# EAGLE board eeZeeTiny841 (EAGLE 6.4)
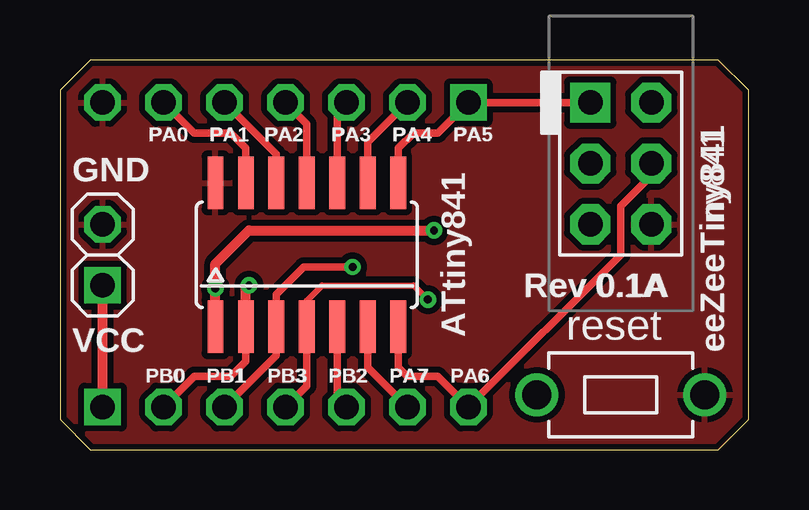
[diagram p0: board, top side]
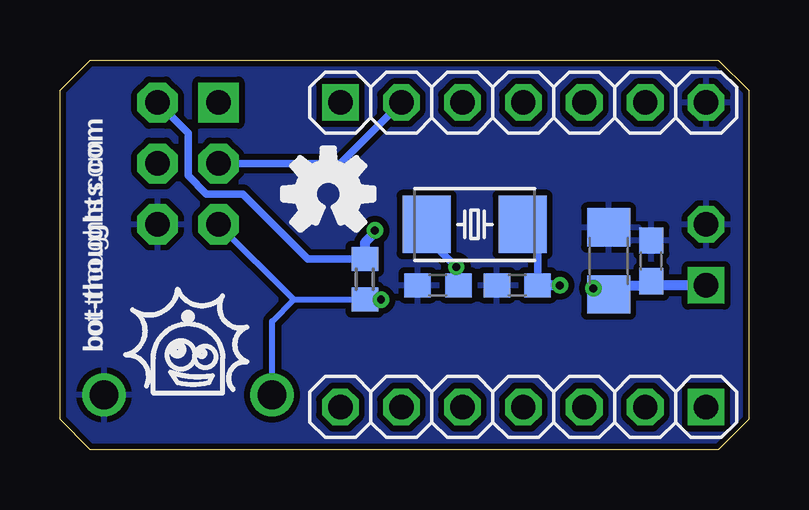
[diagram p1: board, bottom side, seen from below]

Size 28.7 x 16.26 mm. Coordinates in mm from the lower left corner, seen from the top.
Outline: 0,14.99 0,1.27 1.27,0 27.43,0 28.7,1.27 28.7,14.99 27.43,16.26 1.27,16.26 0,14.99
Copper layers (1*16): Top 0.0356mm / dielectric 1.5011mm / Bottom 0.0356mm
Design rules "LaenPCBOrder *": minimum track width 6mil, minimum drill 13mil, track to track 10mil, track to pad 10mil, pad to pad 10mil, via to via 10mil, smd to smd 8mil, copper to edge 10mil, drill to drill 10mil, minimum pad ring 7mil, minimum via ring 7mil, stop-mask expansion 3mil, vias tented up to drill 20mil, thermal gap 10mil

## Footprints (pad centres in the part's own frame; a part is rotated, then mirrored left to right if it is on the bottom)
C0603 = smd 1.1 x 1: 1 -0.85,0; 2 0.85,0
C1206 = smd 1.6 x 1.8: 1 -1.4,0; 2 1.4,0
14SOICN = smd 0.66 x 2.2: 1 -3.81,-3; 2 -2.54,-3; 3 -1.27,-3; 4 0,-3; 5 1.27,-3; 6 2.54,-3; 7 3.81,-3; 8 3.81,3; 9 2.54,3; 10 1.27,3; 11 0,3; 12 -1.27,3; 13 -2.54,3; 14 -3.81,3
CON6P2R = drill 1.016 pad 1.676 square: 1 -2.54,-1.27 | drill 1.016 pad 1.676 octagon: 2 -2.54,1.27; 3 0,-1.27; 4 0,1.27; 5 2.54,-1.27; 6 2.54,1.27
1X02-S = drill 1.016 square: 1 -1.27,0 | drill 1.016 octagon: 2 1.27,0
1X07-S = drill 1.016 square: 1 -7.62,0 | drill 1.016 octagon: 2 -5.08,0; 3 -2.54,0; 4 0,0; 5 2.54,0; 6 5.08,0; 7 7.62,0
NDK_2PAD_5X3 = smd 2 x 2.4: P$1 -2,0; P$2 2,0
R0603 = smd 1 x 1.1: 1 -0.85,0; 2 0.85,0
6MMTACTILE_RECT = drill 1.2: P$1 -3.5,0; P$2 3.5,0

## Placement (x,y rotation side)
C1  0.1uF  [C0603]  4.06,7.87 90 bottom
C2  100uF  [C1206]  5.84,7.87 90 bottom
C4  8pF  [C0603]  12.95,6.86 180 bottom
C5  8pF  [C0603]  9.65,6.86 180 bottom
IC1  ATtiny841  [14SOICN]  10.29,8.13 0 top
J2  avrisp  [CON6P2R]  23.37,11.94 270 top
JP1  PWR  [1X02-S]  1.78,8.13 90 top
JP4  [1X07-S]  9.4,1.78 180 bottom
JP5  [1X07-S]  9.4,14.48 0 bottom
Q1  16MHz  [NDK_2PAD_5X3]  11.43,9.4 180 bottom
R1  10k  [R0603]  16,7.11 90 bottom
S1  reset  [6MMTACTILE_RECT]  23.37,2.29 180 top

## Library data of the parts
C1 = rcl; BOM: EXCLUDE; PARTNO: 0603YC104KAT2A
C2 = rcl; BOM: EXCLUDE; DATABASE: ./../../../EAGLE/PARTSDB.TXT; PARTNO: MCTT21X106M6R3CT
C4 C5 = rcl; BOM: EXCLUDE; DATABASE: ./../../../EAGLE/PARTSDB.TXT; PARTNO: 0603YC104KAT2A
IC1 J2 = bt_avr
JP1 JP4 JP5 = pinhead-2
Q1 = mes_crystal
R1 = rcl; PARTNO: ERJ-3GEYJ103V
S1 = mes_electromech

## Nets
!RESET: IC1.4 J2.5 JP4.4 R1.1 S1.P$2
GND: C1.2 C2.2 C4.2 C5.2 IC1.14 J2.6 JP1.2 JP5.7 S1.P$1
PA0: IC1.13 JP5.6
PA1: IC1.12 JP5.5
PA2: IC1.11 JP5.4
PA3: IC1.10 JP5.3
PA4: IC1.9 J2.3 JP5.2
PA5: IC1.8 J2.1 JP5.1
PA6: IC1.7 J2.4 JP4.7
PA7: IC1.6 JP4.6
PB2: IC1.5 JP4.5
VCC: C1.1 C2.1 IC1.1 J2.2 JP1.1 JP4.1 R1.2
XTAL1: C5.1 IC1.2 JP4.2 Q1.P$1
XTAL2: C4.1 IC1.3 JP4.3 Q1.P$2

## Tracks (layer width: path | path; a pad name or v marks a point on that pad's centre or on a via)
!RESET  (via drill 0.33)
  Top 0.254: IC1.4 10.28,6.21 10.92,6.86 14.73,6.86 v15.33,6.26
  Top 0.305: IC1.4 10.28,2.66 JP4.4
  Bottom 0.254: v15.33,6.26 R1.1 18.96,6.26 | J2.5 18.96,6.26 | S1.P$2 19.87,5.36 18.96,6.26
GND
  pour Bottom: 0,16.26 28.7,16.26 28.7,0 0,0
  pour Top: 0,16.26 28.7,16.26 28.7,0 0,0
PA0
  Top 0.305: IC1.13 7.75,12.57 7.11,13.21 5.59,13.21 JP5.6
PA1
  Top 0.305: IC1.12 9.02,12.32 JP5.5
PA2
  Top 0.305: IC1.11 10.29,13.59 JP5.4
PA3
  Top 0.305: IC1.10 11.56,14.1 JP5.3
PA4
  Top 0.305: IC1.9 12.83,12.83 JP5.2
  Bottom 0.305: JP5.2 17.02,11.94 J2.3
PA5
  Top 0.305: IC1.8 14.1,12.57 14.73,13.21 15.75,13.21 JP5.1 J2.1
PA6
  Top 0.305: IC1.7 14.1,3.43 14.48,3.05 15.75,3.05 JP4.7 23.37,8.13 23.37,10.16 24.64,11.43 J2.4
PA7
  Top 0.305: IC1.6 12.83,3.43 JP4.6
PB2
  Top 0.305: IC1.5 11.56,2.16 JP4.5
VCC  (via drill 0.33)
  Top 0.406: JP4.1 JP1.1 | IC1.1 v6.48,6.73 6.48,7.75 7.87,9.14 v15.58,9.14
  Bottom 0.305: J2.2 23.37,13.21 23.37,11.43 22.61,10.67 21.08,10.67 18.38,7.96 R1.2
  Bottom 0.406: v15.58,9.14 15.49,9.14 16,8.64 R1.2 | v6.48,6.73 5.95,6.73 C2.1 5.1,6.86 4.23,6.86 C1.1 3.9,6.86 JP1.1
XTAL1  (via drill 0.33)
  Top 0.305: IC1.2 7.74,3.67 7.11,3.05 5.59,3.05 JP4.2
  Top 0.406: IC1.2 7.74,6.72 v7.87,6.86
  Bottom 0.305: C5.1 8.8,8.77 Q1.P$1
  Bottom 0.406: v7.87,6.86 C5.1
XTAL2  (via drill 0.33)
  Top 0.305: JP4.3 9.01,3.93 IC1.3 9.01,6.47 10.16,7.62 v12.19,7.62
  Bottom 0.305: C4.1 12.19,6.95 v12.19,7.62 13.43,8.86 Q1.P$2

## Text on the board
tNames: PA0 | PA1 | PA2 | PA3 | PA4 | PA5 | GND | Rev 0.1A | VCC | eeZeeTiny841 | PB0 | PB1 | PB3 | PB2 | PA7 | PA6
bNames: bot-thoughts.com
tsilk: PA0 | PA1 | PA2 | PA3 | PA4 | PA5 | GND | Rev 0.1A | ATtiny841 | reset | VCC | eeZeeTiny841 | PB0 | PB1 | PB3 | PB2 | PA7 | PA6
bsilk: bot-thoughts.com